# Altium PCB PCB_v1.PcbDoc
Units mm, origin at the board's own origin, x right, y up, seen from the top; angles counter-clockwise.
Board outline 35 x 49 mm, 2 copper layers (Top Layer, Bottom Layer); 46 components, 32 nets, 122 pads, 41 vias.
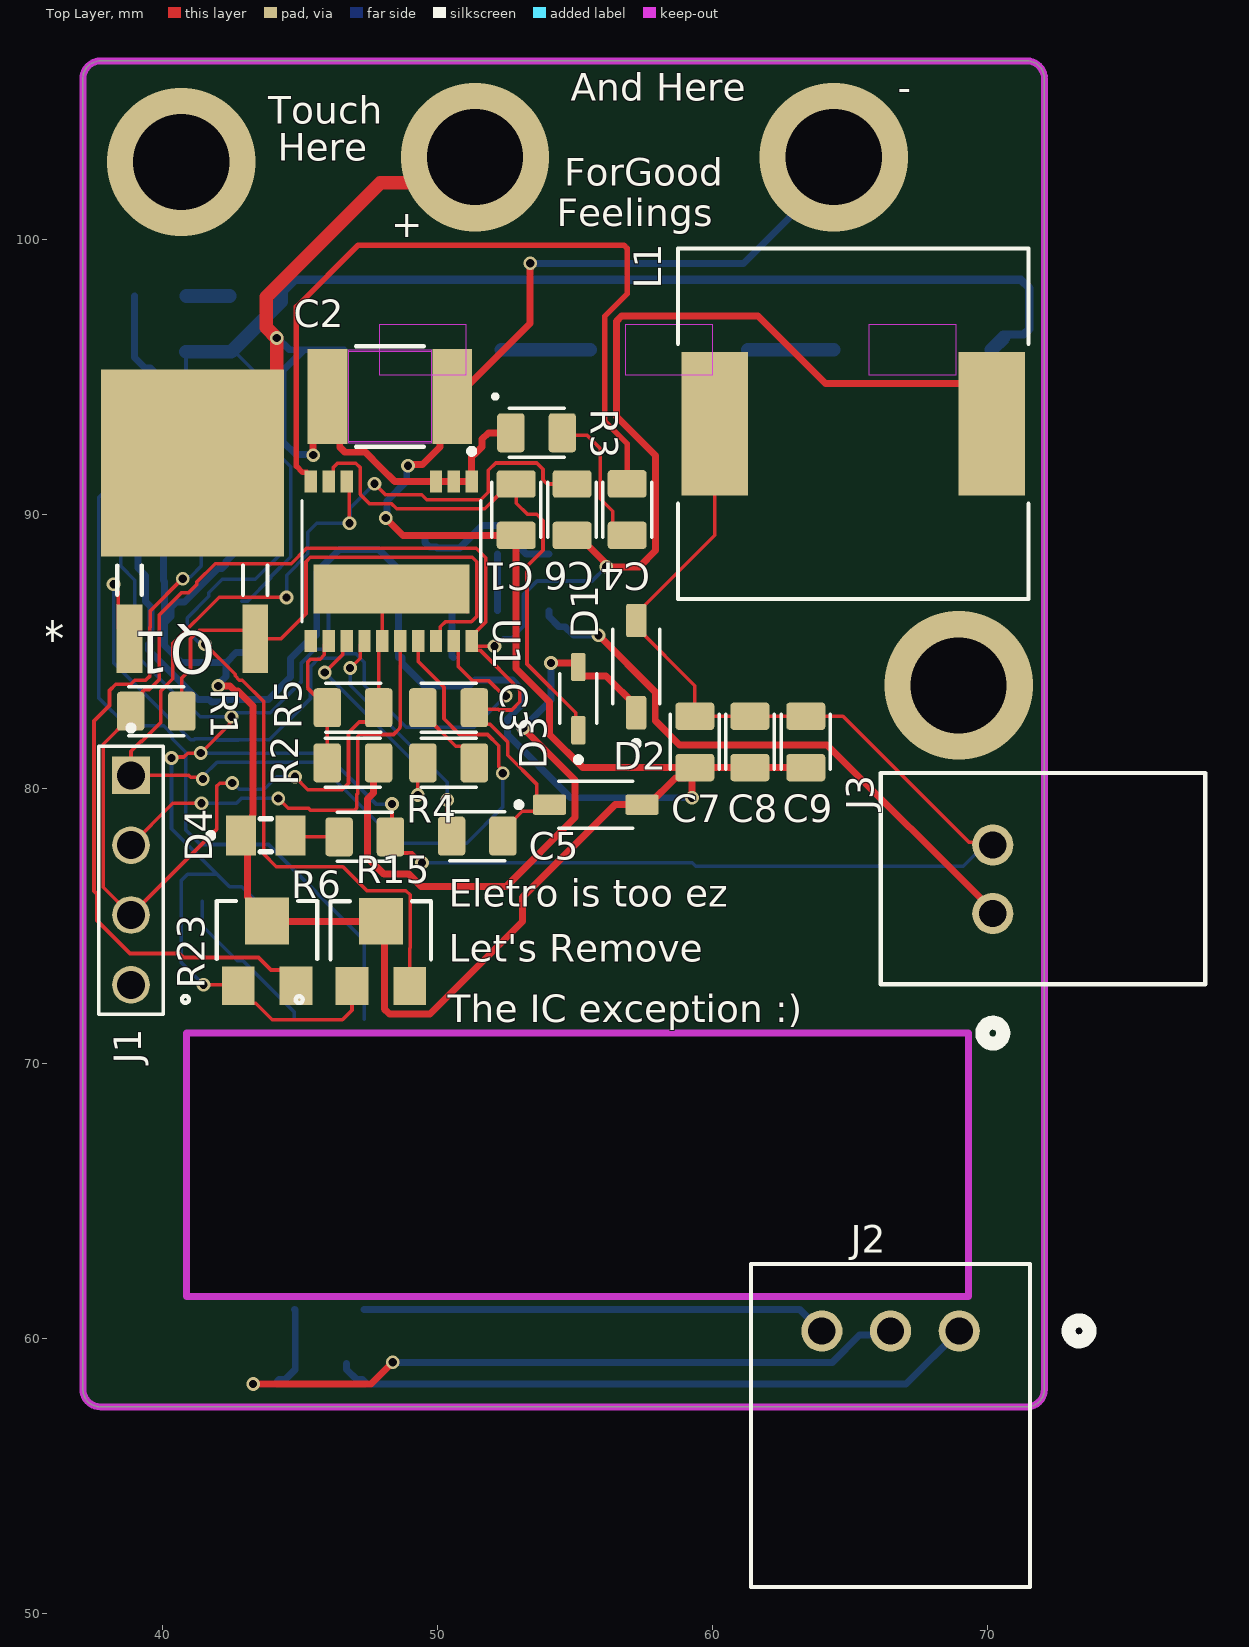
[diagram p0: Top Layer view]
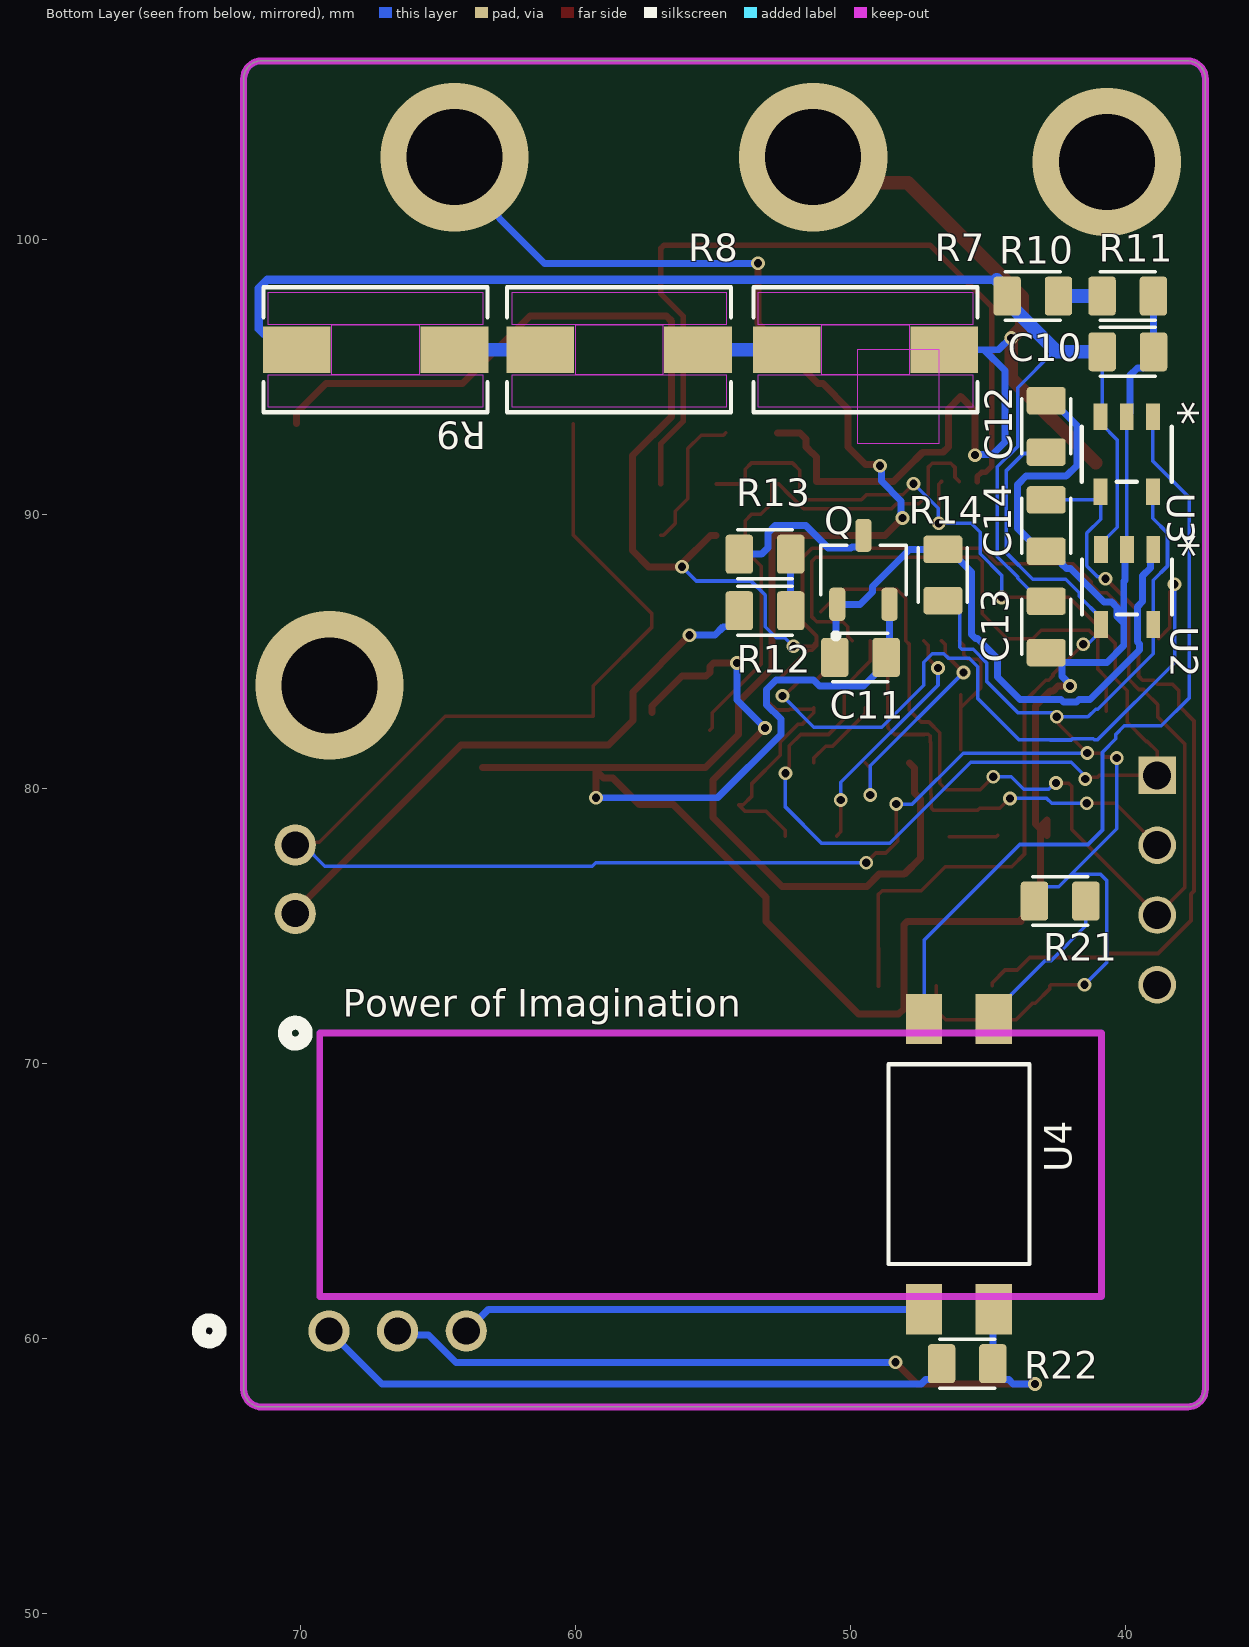
[diagram p1: Bottom Layer view, seen from below]
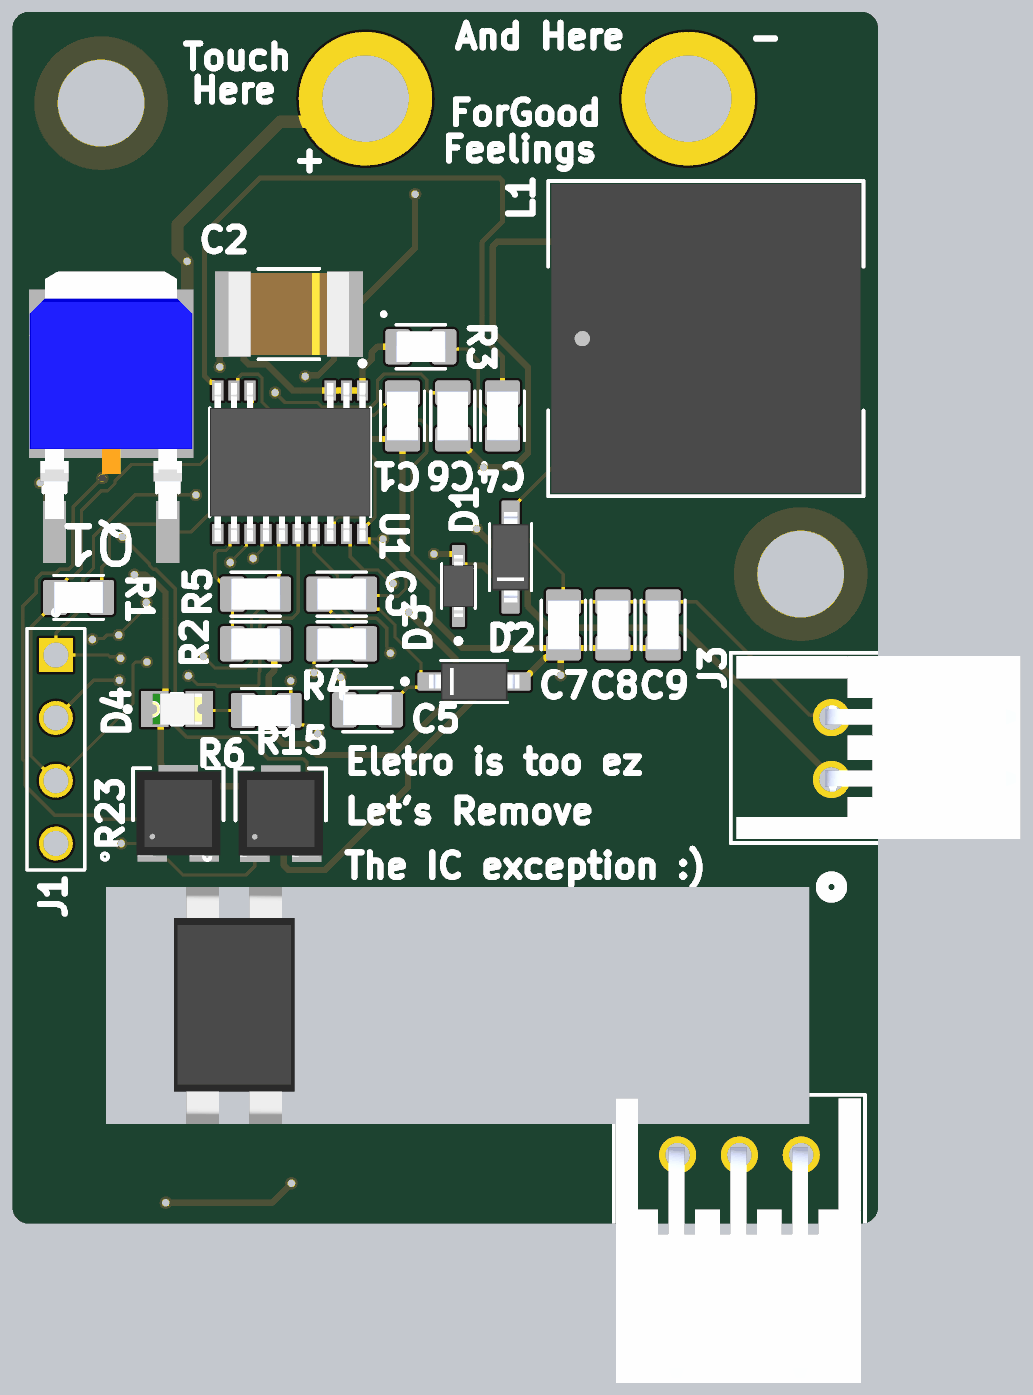
[diagram p2: 3D render of the assembled board from above, using the file's embedded part models]
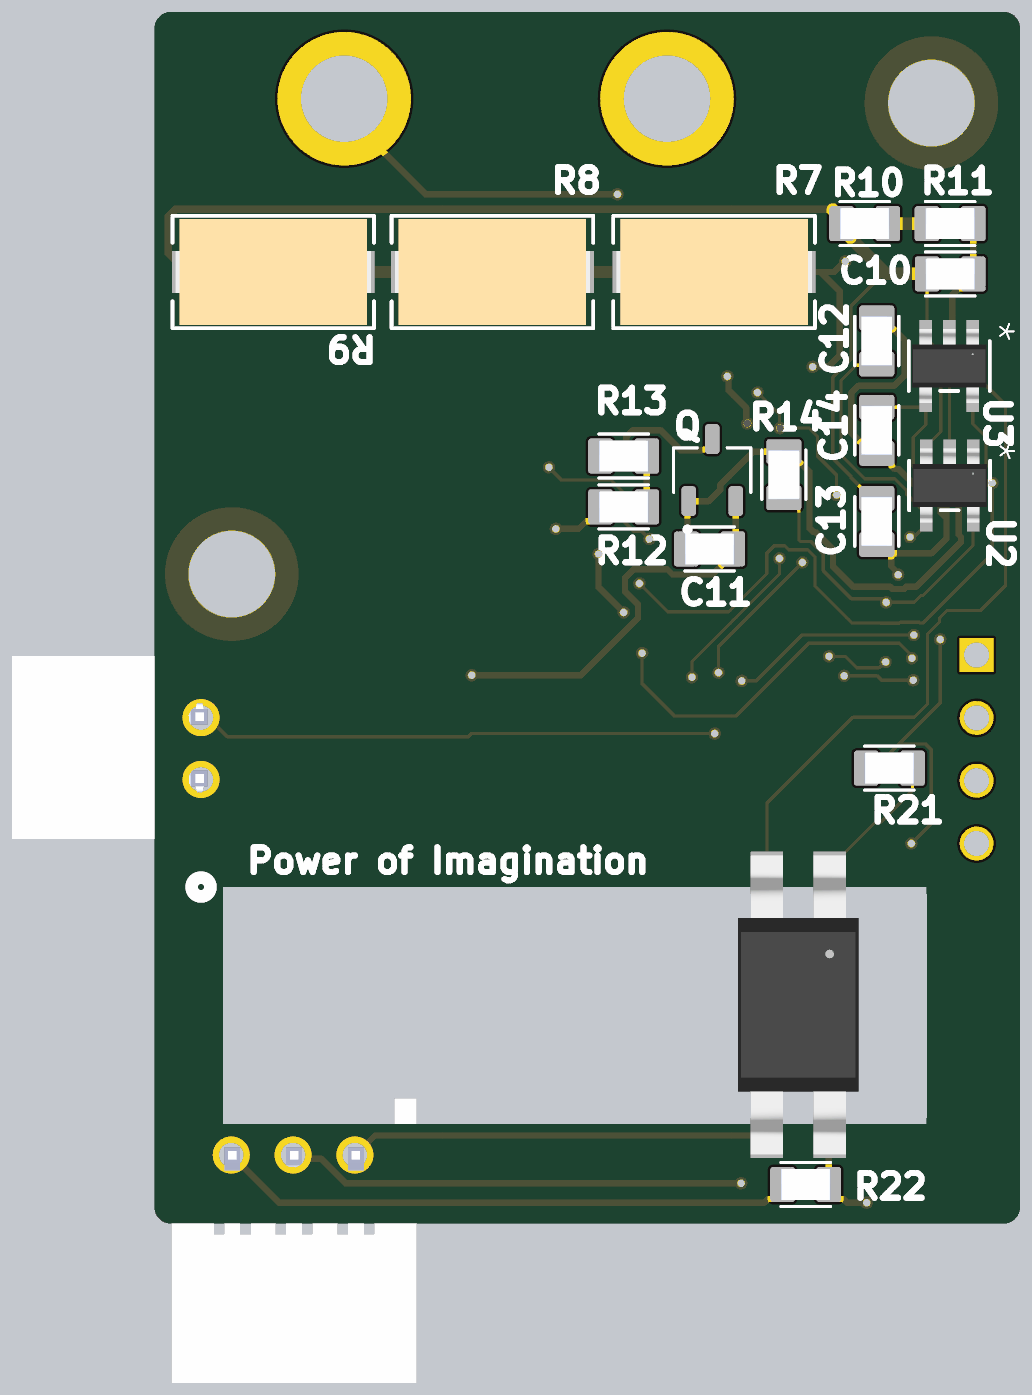
[diagram p3: 3D render of the assembled board from below, using the file's embedded part models]

## Layer stack, top to bottom
Top Solder: solder mask 0.0102, Solder Resist, Dk 3.5
Top Layer: signal copper 0.0356
Dielectric 1: dielectric 0.32, FR-4, Dk 4.8
Bottom Layer: signal copper 0.0356
Bottom Solder: solder mask 0.0102, Solder Resist, Dk 3.5

## Board outline
37.084,58.165 37.084,105.842 cw(c37.732,105.855) 37.719,106.502 71.449,106.502 cw(c71.436,105.855) 72.084,105.842 72.085,105.841 72.085,58.141 cw(c71.438,58.153) 71.425,57.506 71.424,57.504 37.719,57.504 cw(c37.732,58.152)
cut-out: 40.855,61.519 69.317,61.519 69.317,71.119 40.855,71.119

## Design rules (kind name [scope] priority, off if disabled: settings)
Clearance [All] p1: gap=0.2 ignorepadtopadclearanceinfootprint=TRUE
HoleSize [All] p1: absolutevalues=TRUE maxlimit=6.3 minlimit=0.3 maxpercent=80.000 minpercent=20.000
HoleToHoleClearance [All] p1: gap=0.5 allowstackedmicrovias=TRUE
MinimumSolderMaskSliver [All] p1: minsoldermaskwidth=0.1
PolygonConnect [All] p1: connectstyle=Relief reliefconductorwidth=0.254 reliefentries=4 polygonreliefangle="90 Angle" airgapwidth=0.254
RoutingVias [All] p1: holewidth=0.3 width=0.5 viastyle="Through Hole" minholewidth=0.3 minwidth=0.5 maxholewidth=0.711 maxwidth=1.27
SilkToSolderMaskClearance [IsPad] p1: minsilkscreentomaskgap=0 clearancetoexposedcopper=TRUE
SolderMaskExpansion [All] p1: expansion=0.102 istentingtop=FALSE
UnRoutedNet [All] p1: checkbadconnections=TRUE
Width [All] p1: maxlimit=0.5 minlimit=0.13 preferedwidth=0.254 minimp=50.000000 maximp=50.000000 favimp=50.000000
25 further rules are at their usual default settings.

## Classes and differential pairs
component class "Pre-Charge Detector": C13 C14 R21 R22 R23 U3 U4
component class Connectors: J2 J3
component class Buck: C1 C2 C3 C4 C5 C6 C7 C8 C9 D1 D2 D3 D4 J1 L1 Q1 R1 R2 R3 R4 R5 R6 U1
component class 60V_Detector: C10 C11 C12 Q R7 R8 R9 R10 R11 R12 R13 R14 R15 U2

## Components (designator, comment, footprint, x,y, rotation, side; value= is the part's Value field where it differs from the comment)
C1 "10uF 25V" 0805 52.857,90.165 r90 top locked
C2 "0.1uF 630VDC" 1812 48.26,94.285 r180 top
C3 "0.1uF" 0805 50.398,82.957 r180 top
C4 "10pF 630VDC" 0805 56.896,90.17 r90 top
C5 "0.1uF" 0805 51.44,78.283 r180 top
C6 "10uF 25V" 0805 54.889,90.165 r270 top
C7 "47uF" 0805 59.36,81.712 r90 top
C8 "47uF" 0805 61.366,81.712 r90 top
C9 "47uF" 0805 63.398,81.712 r90 top
C10 "10uF" 0805 39.903,95.91 r0 bottom
C11 "10uF" 0805 49.636,84.785 r0 bottom
C12 "0805_Capacitor" 0805 42.875,93.197 r270 bottom
C13 "10uF" 0805 42.875,85.898 r90 bottom
C14 "0805_Capacitor" 0805 42.875,89.586 r90 bottom
D1 "US1KFA" SOD123 57.226,84.455 r90 top
D2 "US1KFA" SOD123 55.753,79.426 r0 top
D3 "CMDSH-3TR" SOD-323 55.118,83.287 r90 top
D4 "LED 0805" "LED 0805" 43.739,78.308 r0 top
J1 "4-POS 2.54mm Header" "4-POS 2.54mm Header" 38.837,80.493 r270 top
J2 "S3B-XH-A(LF)(SN)" "3P JST XH2.54mm 90º" 68.983,60.274 r180 top locked
J3 "S2B-XH-A-1(LF)(SN)" "2P JST XH2.54mm 90º" 70.206,75.463 r90 top
L1 "7447709102 - WURTH" "7447709102 - WURTH" 65.126,93.294 r0 top
Q "N-MOS" AO3402 49.53,87.975 r90 bottom
Q1 "N-MOS" "DPAK - MOSFET" 41.072,91.872 r0 top locked
R1 "220mR" 0805 39.756,82.829 r0 top
R2 "21.5k" 0805 46.914,80.95 r0 top locked
R3 "10k" 0805 53.599,92.964 r0 top
R4 "22.1k" 0805 50.398,80.95 r0 top
R5 "2.49k" 0805 46.919,82.956 r0 top
R6 "10k" 0805 47.346,78.257 r0 top locked
R7 "SMV1W390KJT" SMV1W390KJT 49.454,95.987 r180 bottom
R8 "SMV1W390KJT" SMV1W390KJT 58.42,95.987 r180 bottom
R9 "SMV1W390KJT" SMV1W390KJT 67.285,95.987 r180 bottom
R10 "10K" 0805 43.363,97.942 r180 bottom
R11 "10K" 0805 39.908,97.942 r180 bottom
R12 "10K" 0805 53.111,86.487 r0 bottom
R13 "10K" 0805 53.111,88.544 r180 bottom
R14 "10K" 0805 46.634,87.787 r270 bottom
R15 "3203X502P" 3203X103P 47.93,74.082 r0 top
R21 "10K" 0805 42.367,75.921 r0 bottom
R22 "0805_Resistor" 0805 45.75,59.08 r0 bottom
R23 "3203X502P" 3203X103P 43.79,74.092 r0 top
U1 "LT8316EFE#PBF" IC_LT8316EFE#PBF 48.311,88.29 r270 top locked
U2 "MIC6270YM5-TR" MIC6270 39.929,87.351 r270 bottom
U3 "MIC6270YM5-TR" MIC6270 39.944,92.183 r270 bottom
U4 "VO617A-3X018T" VO617A 46.05,66.345 r270 bottom

## Footprints (in the part's own frame and the unit in brackets; to place one, negate y for a bottom-side part, rotate by r counter-clockwise, add the part's x,y. Pads: shape width x height; smd on the part's side, far side on the other; paste and mask are expansions set on the pad)
"2P JST XH2.54mm 90º" [mil]
  round 59 / inner round 60 / far side round 59 hole 39 paste-99999 mask+0: 1(0,0) 2(98.43,0)
  silkscreen extent -186,-304 202,161, body extent -95,-301 196,151, height 240
"3P JST XH2.54mm 90º" [mil]
  round 59 / inner round 60 / far side round 59 hole 39 paste-99999 mask+0: 1(0,0) 2(98.43,0) 3(196.86,0)
  silkscreen extent -187,-96 298,367, body extent -95,-90 295,363, height 240
"4-POS 2.54mm Header" [mm]
  rect 1.37x1.37 hole 1.02: 1(0,0)
  round 1.37 hole 1.02: 2(2.54,0) 3(5.08,0) 4(7.62,0)
  silkscreen extent -1.82,-1.17 8.69,1.17
0805 [mm]
  rrect25% 1x1.42 smd: 1(-0.935,0) 2(0.935,0)
  silkscreen extent -1,-0.89 1,0.89, body extent -1,-0.63 1,0.63, height 0.6
1812 [mil]
  rect 57x136 smd paste+0 mask+0: 1(-89.5,0) 2(89.5,0)
  Top Layer keep-out region: -59,-65 -59,65 59,65 59,-65
  Keep-Out Layer region: -59,-67 -59,67 59,67 59,-67
  silkscreen extent -154,-72 49,72, body extent -96,-67 96,67, height 86
3203X103P [mil]
  rect 47x55 smd paste+0 mask+0: 1(-41.34,-49.4) 2(41.34,-49.4)
  rect 63x67 smd paste+0 mask+0: 3(0,43.4)
  silkscreen extent -122,-74 72,72, body extent -67,-69 67,69, height 81
"7447709102 - WURTH" [mil] "1000uH - 900mA"
  rect 95x205 smd paste+0 mask+0: 1(-198.5,0) 2(198.5,0)
  silkscreen extent -251,-251 251,251, body extent -246,-246 246,246, height 394
AO3402 [mm]
  rrect50% 1.21x0.59 smd: 1(-1.255,0.95) 2(-1.255,-0.95) 3(1.255,0)
  silkscreen extent -2.5,-1.56 0.9,1.56
"DPAK - MOSFET" [mil]
  rect 37x98 smd paste+0 mask+0: 1(-90.16,-252) 2(90.16,-252)
  rect 262x268 smd paste+0 mask+0: 3(0,0)
  silkscreen extent -108,-189 108,-147, body extent -130,-231 130,163, height 93
IC_LT8316EFE#PBF [mm]
  rect 0.8x0.45 smd: 1(-2.9,2.925) 2(-2.9,2.275) 3(-2.9,1.625) 8(-2.9,-1.625) 9(-2.9,-2.275) 10(-2.9,-2.925) 11(2.9,-2.925) 12(2.9,-2.275) 13(2.9,-1.625) 14(2.9,-0.975) 15(2.9,-0.325) 16(2.9,0.325) 17(2.9,0.975) 18(2.9,1.625) 19(2.9,2.275) 20(2.9,2.925)
  rect 1.78x5.68 smd paste-4: 21(1.016,0)
  silkscreen extent -4.1,-3.25 2.2,3.25, body extent -3.2,-3.25 3.2,3.25, height 1.19
"LED 0805" [mm]
  rect 1.1x1.45 smd: A(0.9,0) C(-0.9,0)
  silkscreen extent -2.1,-0.6 0.2,0.6, body extent -1,-0.63 1,0.63, height 0.7
MIC6270 [mil]
  rect 38.5x20 smd paste+0 mask+0: 1(-53.75,37.4) 2(-53.75,0) 3(-53.75,-37.4) 4(53.75,-37.4) 5(53.75,37.4)
  silkscreen extent -40,-65 40,65, body extent -59,-59 59,59, height 51
SMV1W390KJT [mil]
  rect 97x67 smd paste+0 mask+0: 1(-113,0) 2(113,0)
  Top Layer keep-out region: -62.5,-35.5 -62.5,35.5 62.5,35.5 62.5,-35.5
  Top Layer keep-out region: -153.5,35.5 -153.5,82.5 153.5,82.5 153.5,35.5
  Top Layer keep-out region: -153.5,-82.5 -153.5,-35.5 153.5,-35.5 153.5,-82.5
  Keep-Out Layer region: -62.5,-35.5 -62.5,35.5 62.5,35.5 62.5,-35.5
  silkscreen extent -160,-90 160,90, body extent -156,-84 156,84, height 152
SOD123 [mm]
  rrect18% 1.21x0.73 smd: A(1.68,0) C(-1.68,0)
  silkscreen extent -2.9,-0.85 1.35,0.85, body extent -1.83,-0.77 1.83,0.77, height 1.45
SOD-323 [mm]
  rrect25% 1.03x0.52 smd: A(1.15,0) C(-1.15,0)
  silkscreen extent -2.32,-0.68 0.9,0.68, body extent -1.24,-0.62 1.24,0.62, height 1.09
VO617A [mil]
  rect 72x52 smd paste+0 mask+0: 1(-208,50) 2(-208,-50) 3(208,-50) 4(208,50)
  silkscreen extent -143,-101 143,101, body extent -238,-96 238,96, height 163

## Part data
C1 C3 C4 C5 C6 C7 C8 C9 C10 C11 C13: library part 0805_Capacitor, Package="0805 AVX", Availability="In Stock", Check_prices=https://www.snapeda.com/parts/LD051A121KAB2A/AVX/view-part/?ref=eda, MF=AVX, MP=LD051A121KAB2A, Price=None, Purchase-URL=https://pricing.snapeda.com/search/part/LD051A121KAB2A/?ref=eda, SnapEDA_Link=https://www.snapeda.com/parts/LD051A121KAB2A/AVX/view-part/?ref=snap
C2: library part 1812_Capacitor, Package="0805 AVX", Availability="In Stock", Check_prices=https://www.snapeda.com/parts/LD051A121KAB2A/AVX/view-part/?ref=eda, MF=AVX, MP=LD051A121KAB2A, Price=None, Purchase-URL=https://pricing.snapeda.com/search/part/LD051A121KAB2A/?ref=eda, SnapEDA_Link=https://www.snapeda.com/parts/LD051A121KAB2A/AVX/view-part/?ref=snap
C12 C14: Package="0805 AVX", Availability="In Stock", Check_prices=https://www.snapeda.com/parts/LD051A121KAB2A/AVX/view-part/?ref=eda, MF=AVX, MP=LD051A121KAB2A, Price=None, Purchase-URL=https://pricing.snapeda.com/search/part/LD051A121KAB2A/?ref=eda, SnapEDA_Link=https://www.snapeda.com/parts/LD051A121KAB2A/AVX/view-part/?ref=snap
D1 D2: library part "SOD123 - Generic Diode", Package="SOD-123 Fairchild Semiconductor", Availability="In Stock", Check_prices=https://www.snapeda.com/parts/1N4148W-7-F/Diodes+Inc./view-part/?ref=eda, MF="Diodes Inc.", MP=1N4148W-7-F, Price=None, Purchase-URL=https://pricing.snapeda.com/search/part/1N4148W-7-F/?ref=eda, SnapEDA_Link=https://www.snapeda.com/parts/1N4148W-7-F/Diodes+Inc./view-part/?ref=snap
D3: "Diode Schottky 30V 100mA Surface Mount SOD-323", Package="SOD-323 Central Semiconductor", Availability=Unavailable, MF="Central Semiconductor", MP="CMDSH-3 TR", Price=None, SnapEDA_Link=https://www.snapeda.com/parts/CMDSH-3%20TR/Central%20Semiconductor%20Corp/view-part/447234/?ref=snap
D4: "LED Uni-Color Green 4-Pin Chip 0805 T/R", Package=None, Availability=Unavailable, MP=597-3305-607F, Price=None
J1: Package=None, Availability=Unavailable, MP=5-146290-4, Price=None
J2: library part "3P JST XH2.54mm 90º", "No Description Available", Mfr_Name=JST, Copyright="Copyright (C) 2024 Ultra Librarian. All rights reserved.", Manufacturer_Part_Number=S3B-XH-A(LF)(SN), RefDes=RefDes, Type=DEV
J3: library part "2P JST XH2.54mm 90º", "No Description Available", Mfr_Name=JST, Copyright="Copyright (C) 2024 Ultra Librarian. All rights reserved.", Manufacturer_Part_Number=S2B-XH-A-1(LF)(SN), RefDes=RefDes, Type=DEV
L1: "1000uH - 900mA", Package="Nonstandard Bourns", Digi-Key_Part_Number=SRR1260-680MCT-ND, Digi-Key_Purchase_URL=https://www.digikey.com/product-detail/en/bourns-inc/SRR1260-680M/SRR1260-680MCT-ND/2127423?utm_source=snapeda&utm_medium=aggregator&utm_campaign=symbol, MF=Bourns, MP=SRR1260-680M, SnapEDA_Link=https://www.snapeda.com/parts/SRR1260-680M/Bourns/view-part/337191/?ref=snap
Q Q1: "D-PAK", Package="SOT-23 Alpha &amp; Omega Semiconductor", Digi-Key_Part_Number=785-1002-1-ND, Digi-Key_Purchase_URL=https://www.digikey.ca/product-detail/en/alpha-omega-semiconductor-inc/AO3402/785-1002-1-ND/1855944?utm_source=snapeda&utm_medium=aggregator&utm_campaign=symbol, MF="Alpha &", MP=AO3402, SnapEDA_Link=https://www.snapeda.com/parts/AO3402/Alpha%20&%20Omega%20Semiconductor%20Inc./view-part/564857/?ref=snap
R1 R2 R3 R4 R5 R6 R10 R11 R12 R13 R14 R21: library part 0805_Resistor, Package=0805, Power_Rating=".25 W", Resistance=.33, Tolerance=1%, Availability="In Stock", Check_prices=https://www.snapeda.com/parts/2-2176053-0/TE+Connectivity/view-part/?ref=eda, EU_RoHS_Compliance="Compliant with Exemptions", MF="TE Connectivity", MP=2-2176053-0, Price=None, SnapEDA_Link=https://www.snapeda.com/parts/2-2176053-0/TE+Connectivity/view-part/?ref=snap
R7 R8 R9 R22: Package=0805, Power_Rating=".25 W", Resistance=.33, Tolerance=1%, Availability="In Stock", Check_prices=https://www.snapeda.com/parts/2-2176053-0/TE+Connectivity/view-part/?ref=eda, EU_RoHS_Compliance="Compliant with Exemptions", MF="TE Connectivity", MP=2-2176053-0, Price=None, SnapEDA_Link=https://www.snapeda.com/parts/2-2176053-0/TE+Connectivity/view-part/?ref=snap
R15 R23: library part 3203X103P, "No Description Available", Mfr_Name="TE Connectivity", Copyright="Copyright (C) 2024 Ultra Librarian. All rights reserved.", Manufacturer_Part_Number=3203X502P, RefDes=RefDes, Type=DEV
U1: "560VIN Micropower No-Opto Isolated Flyback Controller", Package="TSSOP -20 Analog Devices", Availability="In Stock", Check_prices=https://www.snapeda.com/parts/LT8316EFE%23PBF/Analog+Devices/view-part/?ref=eda, MF="Analog Devices", MP=LT8316EFE#PBF, Price=None, Purchase-URL=https://pricing.snapeda.com/search/part/LT8316EFE#PBF/?ref=eda, SnapEDA_Link=https://www.snapeda.com/parts/LT8316EFE%23PBF/Analog+Devices/view-part/?ref=snap
U2 U3: "No Description Available", Mfr_Name=Microchip, Copyright="Copyright (C) 2024 Ultra Librarian. All rights reserved.", Manufacturer_Part_Number=MIC6270YM5-TR, RefDes=RefDes, Type=DEV
U4: library part VO617A, "VO617A-3X018T Optocoupler Dc-in 1-CH Transistor Dc-out 4-PIN PDIP SMD T/r", NexarPartId=68099910, Number of Channels=1

## Via types
v1: diameter 0.5, hole 0.3, Top Layer to Bottom Layer, tented both sides, 37 vias
v2: diameter 5.4, hole 3.5, Top Layer to Bottom Layer, 4 vias

## Nets (pads, with @x,y where several pads share a name; then routed paths per layer and width w, separated by ;. In a path a pad name is that pad's centre, name@x,y a point inside that pad or via, vN(x,y) a via of type N, cw(c..) or ccw(c..) an arc to the next point about the centre after c; other vN are vias at no path point)
+12: C7.2 C8.2 C9.2 D1.A J3.2 L1.1 R6.2 R14.2 R15.1 R21.2 R23.1 U2.5 U3.5 | length 97.5
  Top Layer w0.13: v1(40.31,81.128) 40.346,81.163 40.755,81.163 40.897,81.305 v1(41.377,81.305) 42.423,82.352 42.423,82.555 v1(42.494,82.626) ; v1(41.478,72.873) 42.704,72.873 R23.1 42.74,72.735 43.272,72.204 43.373,72.204 43.974,71.603 46.533,71.603 46.88,71.95 R15.1 ; v1(48.336,79.451) 48.336,78.313 R6.2 48.281,78.101 48.711,77.67 49.076,77.67 v1(49.428,77.318) ; L1.1 60.084,89.233 57.226,86.375 D1.A 57.226,85.895 59.36,83.761 C7.2 C8.2 C9.2@63.608,82.647 ; C9.2 64.749,82.647 69.337,78.059 70.11,78.059 J3.2
  Bottom Layer w0.13: U3.5 38.994,89.849 38.46,89.315 38.46,88.117 38.979,87.598 U2.5 38.979,84.922 40.996,82.906 41.076,82.906 41.356,82.626 v1(42.494,82.626) ; v1(40.31,81.128) 40.31,78.555 41.969,76.896 ; v1(41.377,81.305) 45.898,81.305 47.752,79.451 v1(48.336,79.451) v1@48.463,79.451 ; v1(41.478,72.873) 40.667,73.684 40.667,76.667 40.896,76.896 41.969,76.896 ; v1@42.494,82.775 43.903,82.775 45.041,83.912 45.041,84.588 45.536,85.083 45.949,85.083 46.025,85.159 46.025,86.332 46.026,86.334 46.026,86.422 46.457,86.852 R14.2 ; R21.2 43.302,76.01 42.872,76.441 42.424,76.441 41.969,76.896 ; v1(49.428,77.318) 59.268,77.318 59.395,77.191 69.135,77.191 69.908,77.963 J3.2
BIAS: C1.2 D3.C U1.9 | length 19.5
  Top Layer w0.13: U1.9 46.196,91.35 46.196,91.7 46.351,91.855 47.021,91.855 47.176,91.7 47.176,90.72 47.516,90.38 48.321,90.38 48.506,90.195 51.707,90.195 52.177,90.665 52.18,90.665 52.615,91.1 C1.2 52.857,90.405 53.267,89.995 53.604,89.995 53.832,89.767 53.832,88.694 53.249,88.111 53.249,84.546 55.025,82.77 55.025,82.23 D3.C
GND: C1.1 C2.1 C7.1 C8.1 C9.1 C10.1 C11.1 C12.1 C13.1 C14.1 D2.A D4.C Q.2 R11.2 R15.3 R23.3 U2.2 U3.2 | length 129.1
  Top Layer w0.254: v1(42.012,83.744) 42.445,83.744 42.62,83.569 42.726,83.569 43.273,83.023 43.273,79.055 43.262,79.044 43.262,78.731 D4.C D4.C@42.839,78.867 ; D4.C@42.85,78.867 43.078,78.638 43.078,76.067 43.116,76.029 43.116,75.918 43.79,75.245 R23.3 43.8,75.184 R15.3 48.056,75.058 48.056,71.993 48.247,71.801 49.712,71.801 53.08,75.169 53.08,76.058 56.447,79.426 D2.A 57.673,79.426 58.651,80.404 58.987,80.404 C7.1@59.258,80.675 ; v1(48.108,89.865) 48.743,89.23 C1.1 52.857,84.383 54.069,83.171 54.069,81.986 55.278,80.777 C7.1 ; v1(48.92,91.767) 48.967,91.814 49.453,91.814 50.086,92.448 50.086,93.837 51.006,94.758 51.177,94.758 53.365,96.947 v1(53.365,99.132) ; v1(59.258,79.68) C7.1@59.258,80.675 ; C9.1 C7.1 ; C7.1@59.258,80.675 C7.1
  Bottom Layer w0.13: U2.2@39.936,88.723 U3.2@39.936,93.541
  Bottom Layer w0.254: R11.2 38.971,97.94 38.971,95.913 C10.1 38.968,95.7 39.341,95.327 39.551,95.327 39.817,95.062 39.817,93.675 U3.2 U3.2@39.936,93.541 ; U2.2@39.936,88.723 40.012,88.648 40.012,87.594 40.053,87.554 40.053,86.038 ; v1(42.012,83.744) 42.012,83.81 42.292,84.091 42.292,84.59 C13.1@42.309,84.607 ; C13.1 42.665,84.963 C13.1@42.309,84.607 ; C12.1 42.665,94.132 41.758,93.225 41.758,91.781 42.147,91.392 43.603,91.392 43.912,91.083 43.912,89.478 43.085,88.651 C14.1 42.665,88.651 42.292,88.278 42.292,88.169 42.143,88.02 41.996,88.02 40.777,86.801 40.489,86.801 40.298,86.61 40.298,86.284 40.053,86.038 ; v1(48.108,89.865) 48.155,89.912 48.155,90.487 48.873,91.205 48.873,91.72 v1(48.92,91.767) ; C11.1@48.575,84.79 48.575,86.715 Q.2 ; C11.1 48.701,84.575 49.528,83.748 51.134,83.748 51.351,83.965 52.715,83.965 53.053,83.627 53.053,83.063 52.534,82.544 52.534,81.981 54.835,79.68 v1(59.258,79.68) ; v1(53.365,99.132) 61.134,99.132 64.414,102.413 v2(64.414,102.997) ; 40.053,86.038 40.053,85.22 40.665,84.607 C13.1@42.309,84.607
INTVCC: C6.1 J1.1 U1.8 U1.17 | length 50.6
  Top Layer w0.13: v1(41.453,80.366) 41.391,80.428 41.008,80.428 40.943,80.493 J1.1 38.837,81.373 39.192,81.728 39.231,81.728 39.926,82.423 39.926,83.578 40.361,84.013 40.361,85.295 42.047,86.981 44.49,86.981 v1(44.501,86.97) ; U1.8 46.787,91.089 v1(46.787,89.672) ; v1(47.701,91.11) 48.101,90.71 49.416,90.71 49.601,90.525 51.571,90.525 51.841,90.796 51.841,91.595 52.111,91.865 53.604,91.865 53.832,91.637 53.832,91.252 53.984,91.1 C6.1 ; U1.17 49.286,84.645 50.228,83.703 50.228,82.55 50.796,81.982 51.813,81.982 52.222,81.572 52.222,80.815 52.366,80.671 v1(52.366,80.571)
  Bottom Layer w0.13: v1(41.453,80.366) 41.453,80.46 41.968,80.975 45.618,80.975 48.565,78.029 51.054,78.029 52.366,79.341 v1(52.366,80.571) ; v1(44.501,86.97) 44.501,87.782 45.276,88.557 45.276,89.345 45.603,89.672 v1(46.787,89.672) 46.809,89.694 46.809,90.217 v1(47.701,91.11)
"LV GND": J2.3 U4.3 | length 17
  Bottom Layer w0.254: U4.3 63.172,61.062 63.959,60.274 J2.3
NetC2_2: C2.2 Q1.3 R3.1 R7.2 U1.1 U1.2 U1.3 | length 37.2
  Top Layer w0.254: v1(45.466,92.151) 45.466,93.764 C2.2 46.434,93.837 46.434,92.448 46.626,92.256 47.368,92.256 47.937,91.687 47.94,91.687 48.437,91.19 U1.2 U1.1 51.236,92.082 51.385,92.231 51.393,92.231 51.617,92.455 51.617,92.74 51.841,92.964 R3.1
  Top Layer w0.5: Q1.3 44.145,94.945 v1(44.145,96.418) 44.135,96.418 43.757,96.796 43.757,97.91 47.909,102.062 50.624,102.062 v2@51.359,102.797
  Bottom Layer w0.254: v1(44.145,96.418) 44.174,96.418 44.606,95.987 45.136,95.987 ; v1(45.466,92.151) 45.445,92.173 44.835,92.173 44.374,92.634 44.374,95.225 45.136,95.987 ; R7.2 45.136,95.987
  other v2: 51.359,102.997
NetC3_2: C3.2 R4.2 | length 2.9
  Top Layer w0.13: C3.2 49.463,82.747 50.652,81.558 50.903,81.558 51.333,81.127 R4.2
NetC4_1: C4.1 R3.2 | length 5.2
  Top Layer w0.13: R3.2 54.623,92.874 55.436,92.874 55.921,92.39 55.921,90.568 56.376,90.113 56.376,89.665 56.806,89.235 C4.1
NetC4_2: C4.2 U1.10 | length 28.9
  Top Layer w0.2: U1.10 45.386,91.365 45.226,91.525 45.085,91.525 44.856,91.754 44.856,97.545 47.108,99.797 56.779,99.797 56.896,99.679 56.896,98.018 56.079,97.201 56.079,93.385 56.896,92.568 C4.2
NetC5_2: C5.2 U1.14 | length 8.9
  Top Layer w0.13: v1(46.812,84.404) 46.818,84.404 47.176,84.762 47.176,85.23 U1.14 ; v1(50.35,79.596) 50.35,78.438 C5.2
  Bottom Layer w0.13: v1(46.812,84.404) 46.812,83.778 50.35,80.24 v1(50.35,79.596)
NetC10_2: C10.2 C13.2 R9.1 R10.1 U2.3 U3.3 | length 54
  Bottom Layer w0.13: C10.2 40.838,93.604 U3.3 40.894,93.313 40.284,92.703 40.284,89.526 40.67,89.14 40.69,89.14 40.879,88.951 U2.3 ; 42.476,95.91 42.609,95.91 43.917,94.602 43.917,92.465 44.653,91.729 44.653,88.451 43.917,87.714 43.917,87.665 43.085,86.833 C13.2
  Bottom Layer w0.3: R10.1@44.677,98.532 71.228,98.532 71.533,98.227 71.533,96.743 71.328,96.538 70.707,96.538 R9.1@70.607,96.438
  Bottom Layer w0.5: C10.2 42.476,95.91 44.298,97.732 R10.1 44.298,98.152 R10.1@44.677,98.532 ; R9.1 R9.1@70.607,96.438
NetC11_2: C11.2 Q.1 R14.1 U2.1 | length 22.7
  Bottom Layer w0.254: U2.1 39.084,88.611 39.084,88.047 39.371,87.761 39.371,86.816 39.56,86.627 39.56,85.361 39.473,85.274 39.473,85.063 41.275,83.261 41.678,83.261 41.773,83.167 42.251,83.167 42.345,83.261 43.835,83.261 44.649,84.075 44.649,84.75 45.373,85.475 45.449,85.475 45.597,85.623 45.597,87.895 46.424,88.722 47.854,88.722 49.202,87.374 49.202,87.171 49.652,86.72 Q.1 50.526,86.675 50.526,84.831 C11.2
NetC12_2: C12.2 R15.2 U2.4 | length 28.4
  Top Layer w0.13: v1(41.529,85.268) 42.627,84.17 42.627,84.117 42.782,83.961 42.889,83.961 43.665,83.185 43.665,77.632 44.124,77.173 46.55,77.173 47.423,76.3 48.84,76.3 48.995,76.145 48.995,74.223 48.98,74.208 R15.2
  Bottom Layer w0.13: v1(41.529,85.268) 41.458,85.339 41.291,85.339 40.879,85.75 U2.4 40.879,86.22 41.672,87.014 41.672,87.142 42.158,87.628 43.364,87.628 44.323,88.587 44.323,91.592 43.704,92.212 42.926,92.212 C12.2
NetC14_2: C14.2 R23.2 U3.4 | length 28.5
  Top Layer w0.14: v1(40.716,87.655) 39.537,86.476 39.537,85.888 39.522,85.873 39.522,84.115 39.364,83.956 38.973,83.956 38.826,83.809 38.282,83.809 38.051,83.578 38.051,83.034 37.49,82.474 37.49,76.285 37.605,76.17 37.605,75.213 38.802,74.016 40.589,74.016 40.742,73.863 43.472,73.863 43.929,73.406 44.37,73.406 44.84,72.936 R23.2
  Bottom Layer w0.13: v1(40.716,87.655) 40.787,87.726 41.007,87.726 41.398,88.117 41.398,89.315 40.894,89.818 U3.4@40.894,90.71 ; U3.4 U3.4@40.894,90.71 ; C14.2 41.083,90.521 U3.4@40.894,90.71
NetD1_C: D1.C D3.A R2.2 | length 23.6
  Top Layer w0.254: R2.2 47.668,80.769 47.668,79.859 47.449,79.639 47.449,77.49 48.043,76.896 48.958,76.896 49.4,76.454 52.495,76.454 55.005,78.964 55.005,80.326 v1(53.111,82.22) ; v1(54.127,84.582) 54.985,84.582 55.118,84.449 D3.A 55.118,84.247 55.251,84.114 56.128,84.114 57.226,83.015 D1.C
  Bottom Layer w0.254: v1(53.111,82.22) 54.127,83.236 v1(54.127,84.582)
NetD4_A: D4.A R6.1 | length 1.8
  Top Layer w0.13: D4.A 44.69,78.257 R6.1
NetJ2_1: J2.1 R22.2 | length 23.5
  Bottom Layer w0.254: R22.2 46.685,58.87 47.058,58.497 47.268,58.497 47.422,58.344 67.052,58.344 J2.1
NetJ2_2: J2.2 R22.1 U4.4 | length 28
  Top Layer w0.254: v1(43.282,58.344) 47.574,58.344 v1(48.362,59.131)
  Bottom Layer w0.254: v1(43.282,58.344) 44.079,58.344 44.232,58.497 44.442,58.497 44.815,58.87 R22.1 44.815,61.027 U4.4 ; v1(48.362,59.131) 64.362,59.131 65.352,60.122 66.33,60.122 J2.2
NetJ3_1: J3.1 R12.2 | length 21.5
  Top Layer w0.254: v1(55.855,85.598) 57.918,83.534 57.918,82.489 58.803,81.604 64.17,81.604 70.206,75.569 J3.1
  Bottom Layer w0.254: R12.2 54.046,86.277 54.419,85.904 54.629,85.904 54.935,85.598 v1(55.855,85.598)
NetQ1_1: Q1.1 U1.19 | length 27.8
  Top Layer w0.13: v1(38.202,87.452) 38.202,87.352 38.377,87.177 38.377,85.876 Q1.1 ; U1.19 50.746,85.23 50.746,84.458 51.273,83.932 51.87,83.932 52.413,83.388 v1(52.476,83.388)
  Bottom Layer w0.13: v1(38.202,87.452) 38.202,84.591 41.005,81.788 41.131,81.788 41.163,81.82 41.928,81.82 41.968,81.781 42.733,81.781 42.74,81.788 43.866,81.788 45.371,83.293 45.371,84.451 45.672,84.753 46.432,84.753 46.599,84.919 47.026,84.919 47.327,84.618 47.327,83.773 48.855,82.245 51.333,82.245 v1(52.476,83.388)
NetQ1_2: Q1.2 R1.2 U1.18 | length 19.9
  Top Layer w0.13: R1.2 40.691,84.053 41.003,84.365 41.003,85.47 41.316,85.783 43.05,85.783 Q1.2 44.298,85.471 45.206,86.379 45.206,88.274 45.361,88.429 51.261,88.429 51.416,88.274 51.416,86.275 51.229,86.087 50.283,86.087 50.096,85.9 50.096,85.55 U1.18
NetQ_3: Q.3 R13.1 | length 5.9
  Bottom Layer w0.254: Q.3 49.53,88.974 49.696,88.808 49.952,88.808 49.981,88.779 50.812,88.779 51.614,89.581 52.739,89.581 53.003,89.317 53.003,88.779 53.238,88.544 R13.1
NetR2_1: R2.1 R5.1 U1.12 | length 5.3
  Top Layer w0.13: R2.1@45.979,81.432 45.981,81.435 45.981,82.956 R5.1@45.981,83.437 ; R5.1 45.263,83.677 45.263,84.617 45.371,84.725 45.721,84.725 45.876,84.881 45.876,84.979 45.876,85.23 U1.12
NetR4_1: R4.1 U1.13 | length 8.6
  Top Layer w0.13: v1(45.886,84.238) 46.542,84.894 46.542,85.246 U1.13 ; v1(49.276,79.781) 49.276,80.762 R4.1
  Bottom Layer w0.13: v1(45.886,84.238) 49.276,80.847 v1(49.276,79.781)
NetR7_1: R7.1 R8.2 | length 3.2
  Bottom Layer w0.5: R7.1 R8.2
NetR8_1: R8.1 R9.2 | length 3.1
  Bottom Layer w0.5: R8.1 R9.2
NetR10_2: R10.2 R11.1 | length 1.6
  Bottom Layer w0.5: R11.1 R10.2
NetR12_1: R12.1 R13.2 | length 2.1
  Bottom Layer w0.254: R12.1 R13.2
NetR21_1: R21.1 U4.1 | length 5.8
  Bottom Layer w0.13: R21.1 41.432,75.016 42.701,73.747 42.916,73.747 44.78,71.882 U4.1
NetU3_1: U3.1 U4.2 | length 28.7
  Bottom Layer w0.13: U3.1 38.994,91.935 37.668,90.61 37.668,83.312 38.684,82.296 40.03,82.296 40.341,81.985 40.341,81.825 40.825,81.341 40.825,78.506 41.353,77.978 43.84,77.978 47.32,74.498 U4.2
SMODE: J1.2 U1.16 | length 16.6
  Top Layer w0.13: J1.2 40.361,79.477 v1(41.402,79.477) ; v1(44.196,79.654) 44.205,79.654 44.561,79.298 45.299,79.298 45.364,79.232 46.981,79.232 47.057,79.309 47.057,79.802 47.084,79.829 47.084,81.696 47.089,81.701 47.089,81.915 47.165,81.991 47.307,81.991 47.317,81.981 48.39,81.981 48.619,82.21 48.619,82.248 48.636,82.265 U1.16
  Bottom Layer w0.13: v1(41.402,79.477) 42.675,79.477 42.853,79.654 v1(44.196,79.654)
VGND: C3.1 C5.1 C6.2 D2.C J1.3 L1.2 R1.1 R5.2 U1.15 U1.20 U1.21 | length 98.2
  Top Layer w0.13: v1(42.52,80.213) 42.062,80.213 41.951,80.102 41.951,78.527 J1.3 37.825,76.424 37.825,81.624 38.821,82.619 38.821,83.072 39.256,83.507 39.256,83.545 39.332,83.621 39.502,83.621 39.872,83.991 39.872,86.337 40.675,87.14 40.93,87.14 41.231,87.442 41.231,87.535 41.899,88.203 44.668,88.203 45.224,88.759 51.397,88.759 51.746,88.411 51.746,86.075 51.236,85.565 U1.20 U1.20@51.236,85.352 ; v1(44.806,80.442) 45.273,79.975 46.515,79.975 46.754,80.213 46.754,82.047 47.143,82.436 47.423,82.436 47.854,82.867 R5.2 47.854,85.258 U1.15 47.986,86.949 U1.21 50.251,87.274 U1.21@51.076,86.449 ; v1(52.07,85.192) 51.396,85.192 U1.20@51.236,85.352 ; C5.1 52.375,78.493 53.074,79.192 53.839,79.192 D2.C 53.899,79.426 53.599,79.726 53.599,80.183 52.552,81.229 52.552,81.709 51.913,82.349 51.763,82.349 51.333,82.779 C3.1 51.384,82.906 52.21,82.906 52.243,82.873 52.69,82.873 52.991,83.175 52.991,83.602 51.538,85.055 51.396,85.055 51.236,85.215 U1.20@51.236,85.352
  Top Layer w0.254: C6.2 55.099,89.23 56.087,88.243 56.087,88.134 v1(56.134,88.087) 57.347,88.087 57.933,88.673 57.933,92.135 56.506,93.562 56.506,97.024 56.697,97.215 61.664,97.215 64.121,94.758 69.088,94.758 70.168,93.678 L1.2
  Bottom Layer w0.13: v1(42.52,80.213) 42.552,80.213 42.781,79.984 43.69,79.984 44.147,80.442 v1(44.806,80.442) ; v1(52.07,85.192) 52.08,85.192 52.389,85.501 52.702,85.501 53.106,85.905 53.106,87.058 53.617,87.569 55.616,87.569 v1(56.134,88.087)
pads on no net: J1.4 U1.11
copper on no net:
  other v2: 68.961,83.769 40.665,102.819

## Keep-outs
Keep-Out Layer:
  lines w0.254: 71.424,57.504 37.719,57.504 cw(c37.732,58.152) 37.084,58.165 37.084,105.842 cw(c37.732,105.855) 37.719,106.502 71.449,106.502 cw(c71.436,105.855) 72.084,105.842 ; 71.425,57.506 ccw(c71.438,58.153) 72.085,58.141 72.085,105.841 ; 40.855,61.519 40.855,71.119 69.317,71.119 69.317,61.519 40.855,61.519

## Silkscreen, mask and mechanical layers (free items; w line width, h text height)
Top Overlay:
  text "And Here" at 54.839,105.054 h1
  text "-" at 66.751,105.037 h1
  text "Touch" at 43.84,104.216 h1
  text "Here" at 44.171,102.87 h1
  text "ForGood" at 54.61,101.956 h1
  text "Feelings" at 54.331,100.485 h1
  text "+" at 48.311,100.087 h1
  text "Eletro is too ez" at 50.394,75.717 h1
  text "Let's Remove" at 50.394,73.711 h1
  text "The IC exception :)" at 50.368,71.504 h1
Bottom Overlay:
  text "Power of Imagination" at 68.478,71.706 h1

## Text inside footprints (layer, text, board x,y; h text height)
Q1: Top Overlay "*" at 35.539,84.836 h1.27; Mechanical 13 "*" at 38.464,88.443 h1.27
U2: Mechanical 13 "*" at 39.69,88.29 h1.27 r90; Bottom Overlay "*" at 38.598,89.287 h1.27 r90
U3: Mechanical 13 "*" at 39.705,93.123 h1.27 r90; Bottom Overlay "*" at 38.613,94.12 h1.27 r90
U4: Mechanical 13 "*" at 44.958,69.787 h0 r90; Bottom Overlay "*" at 43.586,72.2 h0 r90